# Altium PCB Audio IO Switch - PCB v1.0 20210130.PcbDoc
Units mil, origin at the board's own origin, x right, y up, seen from the top; angles counter-clockwise.
Board outline 2270.16 x 2228.79 mil, 2 copper layers (Top Layer, Bottom Layer), stack 65.792 mil thick; 7 components, 11 nets, 24 pads, 134 vias.
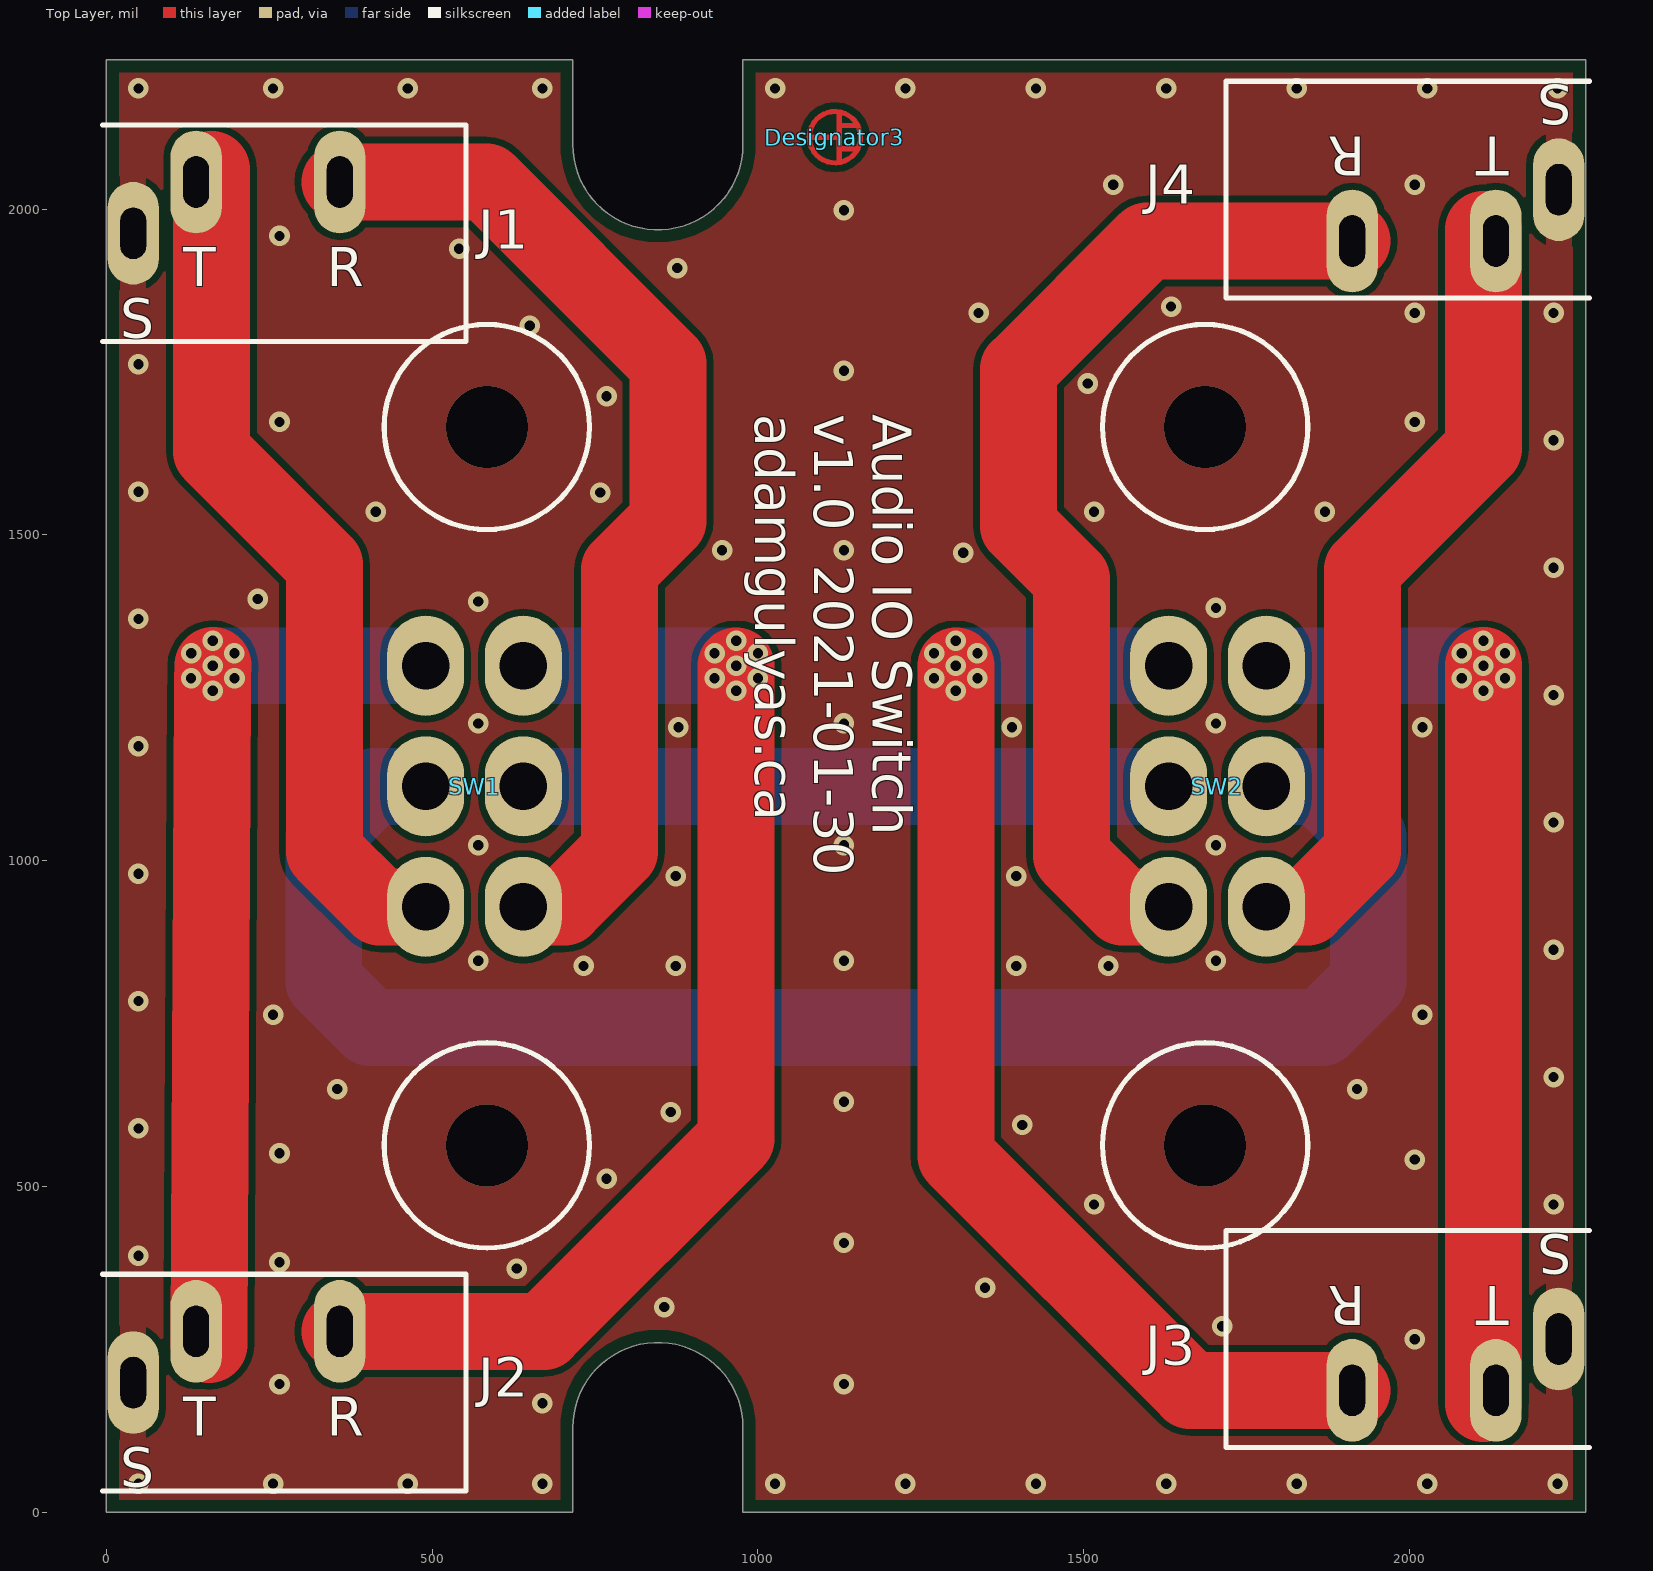
[diagram p0: Top Layer view]
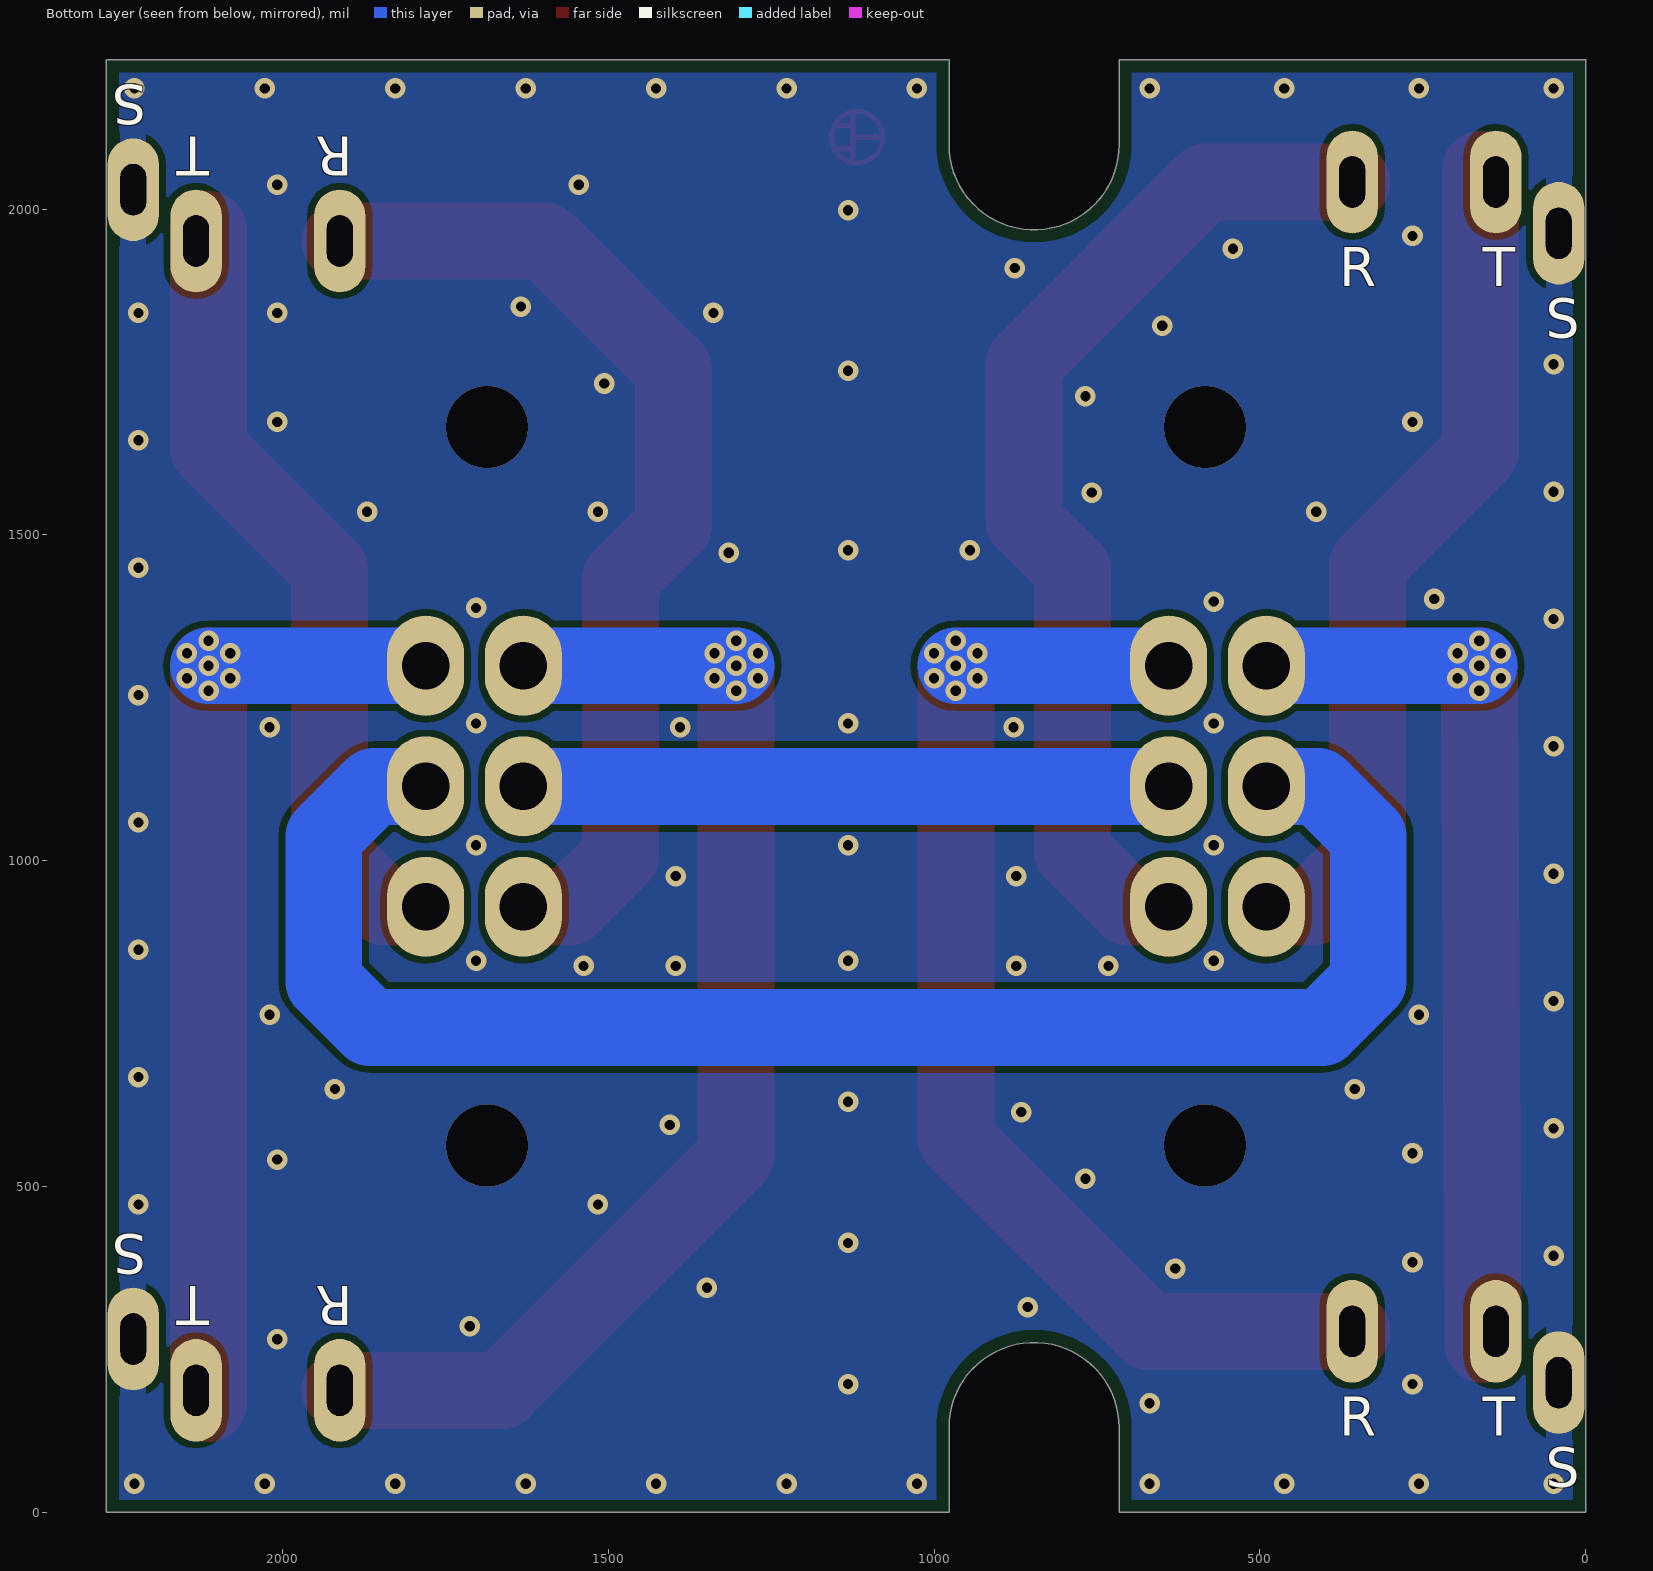
[diagram p1: Bottom Layer view, seen from below]
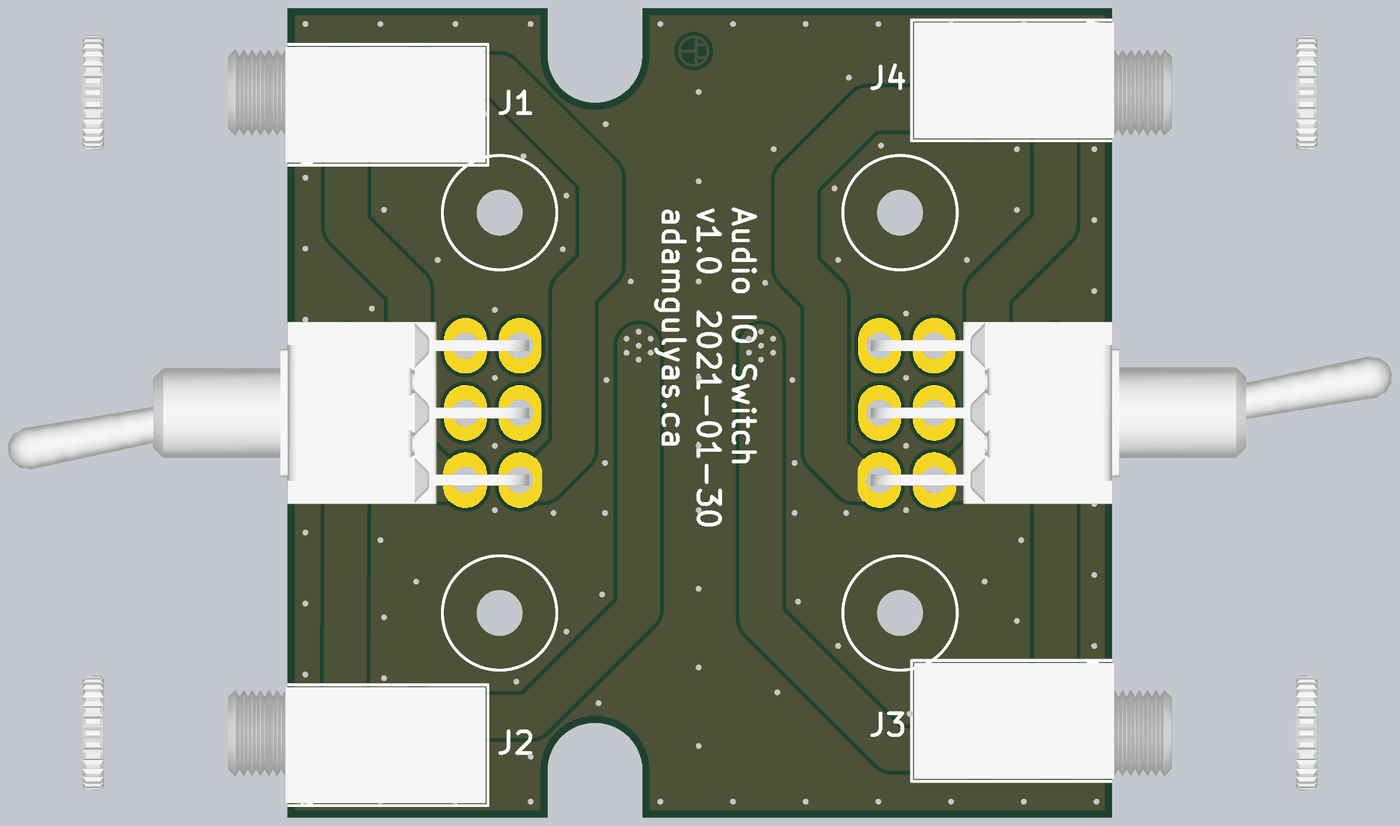
[diagram p2: 3D render of the assembled board from above, using the file's embedded part models]

## Layer stack, top to bottom
Top Solder: solder mask 0.4, Solder Resist, Dk 3.5
Top Layer: signal copper 1.4
Dielectric 1: dielectric 62.9921, FR-4, Dk 4.8
Bottom Layer: signal copper 1.4
Bottom Solder: solder mask 0.4, Solder Resist, Dk 3.5

## Board outline
0,0 0,2228.79 715.9,2228.79 715.9,2098.65 ccw(c846.46,2098.65) 977.01,2098.65 977.01,2228.79 2270.16,2228.79 2270.16,0 977.01,0 977.01,130.14 ccw(c846.46,130.14) 715.9,130.14 715.9,0

## Design rules (kind name [scope] priority, off if disabled: settings)
Clearance [All] p1: gap=10 ignorepadtopadclearanceinfootprint=FALSE except(0: Arc-Hole Track-Hole SMDPad-Hole THPad-Hole Via-Hole Fill-Hole Poly-Hole Region-Hole Text-Hole)
PolygonConnect [All] p1: thpad.connectstyle=Relief thpad.reliefconductorwidth=39.37 thpad.reliefentries=4 thpad.polygonreliefangle="90 Angle" thpad.airgapwidth=10 smdpad.connectstyle=Relief smdpad.reliefconductorwidth=19.68 smdpad.reliefentries=4 smdpad.polygonreliefangle="90 Angle" smdpad.airgapwidth=10 via.connectstyle=Direct via.reliefconductorwidth=19.68 via.reliefentries=4 via.polygonreliefangle="90 Angle" via.airgapwidth=10
RoutingVias [All] p1: holewidth=28 width=50 viastyle="Through Hole" minholewidth=3.94 minwidth=7.87 maxholewidth=28 maxwidth=50
SolderMaskExpansion [All] p1: expansion=4
Width [All] p1: maxlimit=393.7 minlimit=10 preferedwidth=10 minimp=50.000000 maximp=50.000000 favimp=50.000000
30 further rules are at their usual default settings.

## Components (designator, comment, footprint, x,y, rotation, side; value= is the part's Value field where it differs from the comment)
Designator3 "Comment" "Symbol - logo" 1118.11,2110.24 r270 top
J1 "Jack - TRS - 35RAPC2BV4" "JACK - TRS - MJ-3502" -5.91,1996.26 r0 top
J2 "Jack - TRS - 35RAPC2BV4" "JACK - TRS - MJ-3502" -5.91,232.53 r0 top
J3 "Jack - TRS - 35RAPC2BV4" "JACK - TRS - MJ-3502" 2276.06,232.53 r180 top
J4 "Jack - TRS - 35RAPC2BV4" "JACK - TRS - MJ-3502" 2276.06,1996.26 r180 top
SW1 "Toggle" "SW - TOGGLE - RA - 100DP1T1B1M6QE" 0,1114.17 r0 top
SW2 "Toggle" "SW - TOGGLE - RA - 100DP1T1B1M6QE" 2270.16,1114.17 r180 top

## Footprints (in the part's own frame and the unit in brackets; to place one, negate y for a bottom-side part, rotate by r counter-clockwise, add the part's x,y. Pads: shape width x height; smd on the part's side, far side on the other; paste and mask are expansions set on the pad)
"JACK - TRS - MJ-3502" [mm] "from CP-3502MJ-ND"
  oval 2x4 hole 1 slot 2 at 90 deg mask+0.05: 1(1.2,-0.85) 2(3.65,1.15) 4(9.25,1.15)
  silkscreen extent 0,-5.07 14.18,3.38, body extent -14.2,-4.9 14,3.99, height 12.3
"SW - TOGGLE - RA - 100DP1T1B1M6QE" [mm] "from 100DP1T1B1M6QE-ND"
  oval 3x3.9 hole 1.85 mask+0.05: 1(12.446,-4.699) 2(12.446,0) 3(12.446,4.699) 4(16.256,-4.699) 5(16.256,0) 6(16.256,4.699)
  body extent -19.56,-6.35 16.9,6.35, height 11.44
"Symbol - logo" [mil]
  Top Layer circle w7.87: c0,0 r39.37
  Top Layer lines w7.87: 0,-39.37 0,6.69 ; 38.58,6.69 -38.58,6.69 ; 17.72,6.79 17.72,35.04 ; -17.72,6.79 -17.72,35.04

## Part data
J1 J2 J3 J4: "CONN JACK STEREO 3.5MM R/A", Actual Diameter="0.142\"\" (3.60mm)", ComponentLink1Description=Datasheet, ComponentLink1URL="E:\!Projects\52 Audio IO Switch\Datasheets\Switchcraft - TRS - 35RAPC2BV4.pdf", ComponentLink2Description="Online Datasheet", ComponentLink2URL=https://www.switchcraft.com/Drawings/35rapc__v4_cd.pdf, Connector Type="Phone Jack", Features="Mounting Hardware, Thread Lock", Gender=Female, Housing Material="Polybutylene Terephthalate (PBT), Glass Filled", Includes="3 pcs - 1 Connector, 1 Nut, 1 Washer", Industry Recognized Mating Diameter="3.50mm (0.141\"\", 1/8\"\", Mini Plug) - Headphone", Internal Switch(s)="Does Not Contain Switch", MFG=Switchcraft, MFG PN=35RAPC2BV4, Mounting Type="Panel Mount, Through Hole, Right Angle", Number of Positions/Contacts="3 Conductors, 3 Contacts", Shielding=Unshielded, Signal Lines="Stereo (3 Conductor, TRS)"
  J1: Digi-Key PN=SC1460-ND
  J2 J3 J4: Digi-Key PN="Switchcraft Inc."
SW1 SW2: library part "SW - DPDT - 100DP1T1B1M6QE", "SWITCH TOGGLE DPDT 5A 120V", Op Temp="-30°C ~ 85°C", Voltage Rating - DC=28V, Bushing Thread=1/4-40, Circuit=DPDT, ComponentLink1Description=Datasheet, ComponentLink1URL="E:\!Projects\52 Audio IO Switch\Datasheets\E-Switch - 100DP1T1B1M6QE.pdf", ComponentLink2Description="Online Datasheet", ComponentLink2URL=http://spec_sheets.e-switch.com/specs/T121059.pdf, Digi-Key PN=100DP1T1B1M6QE-ND, Electrical Life="40,000 Cycles", MFG=E-Switch, MFG PN=100DP1T1B1M6QE, Mounting Type="Panel Mount, Right Angle", Panel Cutout Dimensions="Circular - 6.35mm Dia", Series=100, Switch Function=On-On

## Via types
v1: diameter 31.5, hole 15.75, Top Layer to Bottom Layer, tented both sides, 130 vias
v2: diameter 125.98, hole 125.98, Top Layer to Bottom Layer, tented both sides, 4 vias

## Nets (pads, with @x,y where several pads share a name; then routed paths per layer and width w, separated by ;. In a path a pad name is that pad's centre, name@x,y a point inside that pad or via, vN(x,y) a via of type N, cw(c..) or ccw(c..) an arc to the next point about the centre after c; other vN are vias at no path point)
GND: J1.1 J2.1 J3.1 J4.1
  other v1: 49.21,43.75 255.91,43.75 462.6,43.75 669.29,43.75 1026.22,43.75 1226.36,43.75 1426.49,43.75 1626.62,43.75 1826.75,43.75 2026.88,43.75 2227.01,43.75 669.29,167.32 265.75,196.85 1131.89,196.85 2007.87,265.75 1712.6,285.43 856.3,314.96 1348.43,344.49 629.92,374.02 265.75,383.86 49.21,393.7 1131.89,413.39 1515.75,472.44 2220.94,472.44 767.72,511.81 2007.87,541.34 265.75,551.18 49.21,589.14 1405.51,594.49 866.14,614.17 1131.89,629.92 354.33,649.61 1919.29,649.61 2220.94,667.89 255.91,763.78 2019.68,763.78 49.21,784.59 732.28,838.58 874.02,838.58 1396.14,838.58 1537.87,838.58 570.87,846.46 1131.89,846.46 1702.76,846.46 2220.94,863.33 874.02,976.38 1396.14,976.38 49.21,980.03 570.87,1023.62 1131.89,1023.62 1702.76,1023.62 2220.94,1058.77 49.21,1175.48 877.95,1204.72 1389.76,1204.72 2019.68,1204.72 570.87,1210.63 1131.89,1210.63 1702.76,1210.63 2220.94,1254.22 49.21,1370.92 1702.76,1387.8 570.87,1397.64 232.28,1401.57 2220.94,1449.66 1314.96,1472.44 944.88,1476.38 1131.89,1476.38 413.39,1535.43 1515.75,1535.43 1870.08,1535.43 757.87,1564.96 49.21,1566.37 2220.94,1645.11 265.75,1673.23 2007.87,1673.23 767.72,1712.6 1505.91,1732.28 1131.89,1751.97 49.21,1761.81 649.61,1820.87 1338.58,1840.55 2007.87,1840.55 2220.94,1840.55 1633.86,1850.39 875.98,1909.45 541.34,1938.98 265.75,1958.66 1131.89,1998.03 1545.28,2037.4 2007.87,2037.4 49.21,2185.04 255.91,2185.04 462.6,2185.04 669.29,2185.04 1026.22,2185.04 1226.36,2185.04 1426.49,2185.04 1626.62,2185.04 1826.75,2185.04 2026.88,2185.04 2227.01,2185.04
  other v2: 583.9,563.21 1686.26,563.21 583.9,1665.58 1686.26,1665.58
Left: SW1.2 SW2.2 | length 2482.7
  Bottom Layer w118.11: SW1.2 410.43,1114.17 333.66,1037.4 333.66,814.96 404.53,744.09 1865.63,744.09 1936.49,814.96 1936.49,1037.4 1859.72,1114.17 SW2.2
NetJ1_2: J1.2 SW1.1 | length 1309.4
  Top Layer w118.11: J1.2@161.42,2061.02 161.42,1627.76 334.65,1454.53 334.65,1013.78 419.25,929.17 SW1.1
NetJ1_4: J1.4 SW1.4 | length 1581.8
  Top Layer w118.11: J1.4 583.46,2041.54 862.2,1762.8 862.2,1521.38 787.4,1446.57 787.4,1013.78 702.8,929.17 SW1.4
NetJ2_2: J2.2 SW1.3 | length 1368
  Top Layer w118.11: J2.2@157.48,257.88 157.59,277.69 163.17,1260.75 163.28,1279.81 163.28,1280.13 v1(163.39,1299.17)
  Bottom Layer w118.11: v1(163.39,1299.17) SW1.3
  other v1: 163.39,1260.75 130.11,1280 196.7,1279.94 130.14,1318.44 196.66,1318.43 163.39,1337.68
NetJ2_4: J2.4 SW1.6 | length 1783.5
  Top Layer w118.11: J2.4 671.51,277.81 966.61,572.91 v1(966.61,1260.75) 966.61,1279.94 v1(966.61,1299.17)
  Bottom Layer w118.11: SW1.6 933.37,1299.17 v1(966.61,1299.17)
  other v1: 933.34,1280 999.93,1279.94 933.37,1318.44 999.89,1318.43 966.61,1337.68
NetJ3_2: J3.2 SW2.1 | length 1464.9
  Top Layer w118.11: J3.2@2113.19,167.32 v1(2113.19,1260.75) v1(2113.19,1299.17)
  Bottom Layer w118.11: SW2.1 2079.95,1299.17 v1(2113.19,1299.17)
  other v1: 2079.91,1280 2146.5,1279.94 2079.95,1318.44 2146.47,1318.43 2113.19,1337.68
NetJ3_4: J3.4 SW2.4 | length 1836.2
  Top Layer w118.11: v1(1303.54,1299.17) v1(1303.54,1260.75) 1303.54,546.85 1663.14,187.25 J3.4
  Bottom Layer w118.11: v1(1303.54,1299.17) 1336.85,1299.17 SW2.4
  other v1: 1270.26,1280 1336.85,1279.94 1270.3,1318.44 1336.82,1318.43 1303.54,1337.68
NetJ4_2: J4.2 SW2.3 | length 1214.1
  Top Layer w118.11: SW2.3 1842.95,929.17 1927.56,1013.78 1927.56,1446.57 2113.19,1632.21 J4.2@2113.19,1968.5
NetJ4_4: J4.4 SW2.6 | length 1555.3
  Top Layer w118.11: SW2.6 1559.41,929.17 1480.94,1007.64 1480.94,1432.44 1400,1513.39 1400,1754.33 1596.65,1950.98 J4.4
Right: SW1.5 SW2.5 | length 990.2
  Bottom Layer w118.11: SW1.5 SW2.5

## Polygon pours and split planes (outlines as drawn)
GND on Bottom Layer "Bottom Layer-GND" (solid, pour order 0): 19.68,19.68 19.69,2209.1 696.22,2209.1 696.22,2098.65 ccw(c846.46,2098.65) 996.69,2098.65 996.7,2098.65 996.7,2209.1 2250.47,2209.1 2250.47,19.68 996.7,19.68 996.7,130.14 996.69,130.14 ccw(c846.46,130.14) 696.22,130.14 696.22,19.68
GND on Top Layer "Top Layer-GND" (solid, pour order 2): 19.68,19.68 19.69,2209.1 696.22,2209.1 696.22,2098.65 ccw(c846.46,2098.65) 996.69,2098.65 996.7,2098.65 996.7,2209.1 2250.47,2209.1 2250.47,19.68 996.7,19.68 996.7,130.14 996.69,130.14 ccw(c846.46,130.14) 696.22,130.14 696.22,19.68

## Silkscreen, mask and mechanical layers (free items; w line width, h text height)
Top Overlay:
  circle w7.87: c583.9,563.21 r157.48
  circle w7.87: c1686.26,563.21 r157.48
  circle w7.87: c583.9,1665.58 r157.48
  circle w7.87: c1686.26,1665.58 r157.48
  text "Audio IO Switch / v1.0  2021-01-30 / adamgulyas.ca" at 996.06,1685.04 h60 r270
Mechanical 1:
  lines w7.87: 0,2129.13 0,2228.79
  lines w19.68: 0,0 715.9,0 715.9,130.14 cw(c846.46,130.14) 977.01,130.14 977.01,0 2270.16,0 2270.16,2228.79 977.01,2228.79 977.01,2098.65 cw(c846.46,2098.65) 715.9,2098.65 715.9,2228.79 0,2228.79 0,0
Mechanical 2:
  lines w3.94: 19.68,19.68 696.22,19.68 696.22,130.14 cw(c846.46,130.14) 996.69,130.14 996.7,19.68 2250.47,19.68 2250.47,2209.1 996.7,2209.1 996.7,2098.65 cw(c846.46,2098.65) 696.22,2098.65 696.22,2209.1 19.69,2209.1 19.68,19.68
Mechanical 3:
  circle w19.68: c583.9,1665.58 r62.99
  circle w19.68: c1686.26,1665.58 r62.99
  circle w19.68: c1686.26,563.21 r62.99
  circle w19.68: c583.9,563.21 r62.99
  lines w7.87: -5.91,232.53 -42.7,67.13 0,0 ; -5.91,1996.26 -25.28,2198.14 0,2228.79 ; 2270.16,0 2312.86,67.13 2276.06,232.53 ; 2270.16,2228.79 2295.44,2198.14 2276.06,1996.26

## Text inside footprints (layer, text, board x,y; h text height)
J1: Top Overlay "T" at 117.8,1881.55 h60; Top Overlay "R" at 338.27,1881.55 h60; Top Overlay "S" at 21.35,1802.8 h60; Bottom Overlay "S" at 61.33,1802.8 h60; Bottom Overlay "R" at 378.26,1881.55 h60; Bottom Overlay "T" at 157.79,1881.55 h60
J2: Top Overlay "T" at 117.8,117.81 h60; Top Overlay "R" at 338.27,117.81 h60; Top Overlay "S" at 21.35,39.07 h60; Bottom Overlay "S" at 61.33,39.07 h60; Bottom Overlay "R" at 378.26,117.81 h60; Bottom Overlay "T" at 157.79,117.81 h60
J3: Top Overlay "S" at 2248.81,425.98 h60 r180; Top Overlay "R" at 1931.88,347.24 h60 r180; Top Overlay "T" at 2152.35,347.24 h60 r180; Bottom Overlay "T" at 2112.37,347.24 h60 r180; Bottom Overlay "R" at 1891.89,347.24 h60 r180; Bottom Overlay "S" at 2208.82,425.98 h60 r180
J4: Top Overlay "S" at 2248.81,2189.71 h60 r180; Top Overlay "R" at 1931.88,2110.97 h60 r180; Top Overlay "T" at 2152.35,2110.97 h60 r180; Bottom Overlay "T" at 2112.37,2110.97 h60 r180; Bottom Overlay "R" at 1891.89,2110.97 h60 r180; Bottom Overlay "S" at 2208.82,2189.71 h60 r180